# Altium PCB TINY24_PCB.PcbDoc
Units mil, origin at the board's own origin, x right, y up, seen from the top; angles counter-clockwise.
Board outline 1180 x 790 mil, 2 copper layers (Top Layer, Bottom Layer); 12 components, 16 nets, 61 pads, 7 vias.
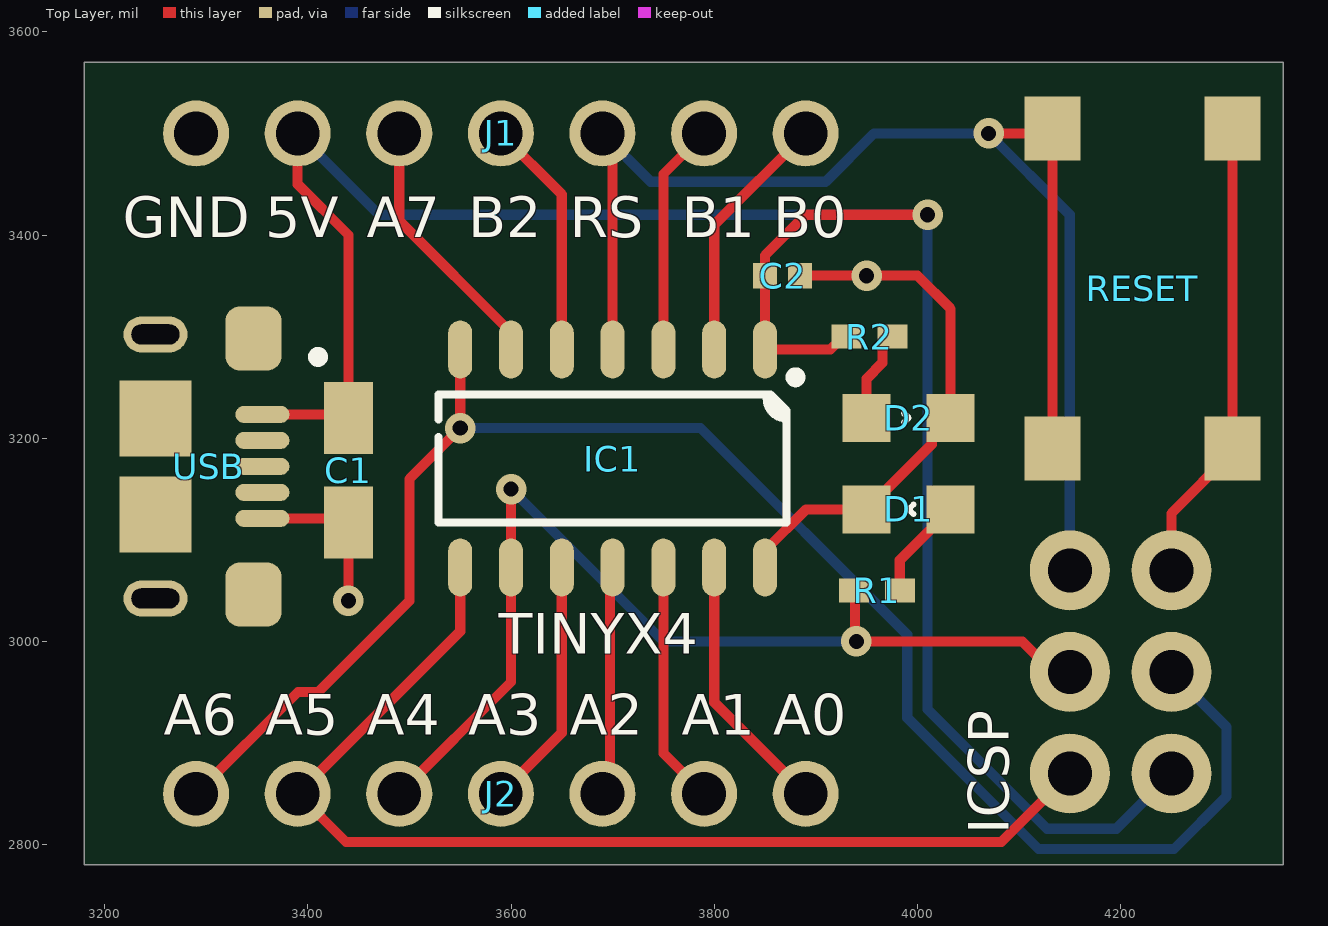
[diagram p0: Top Layer view]
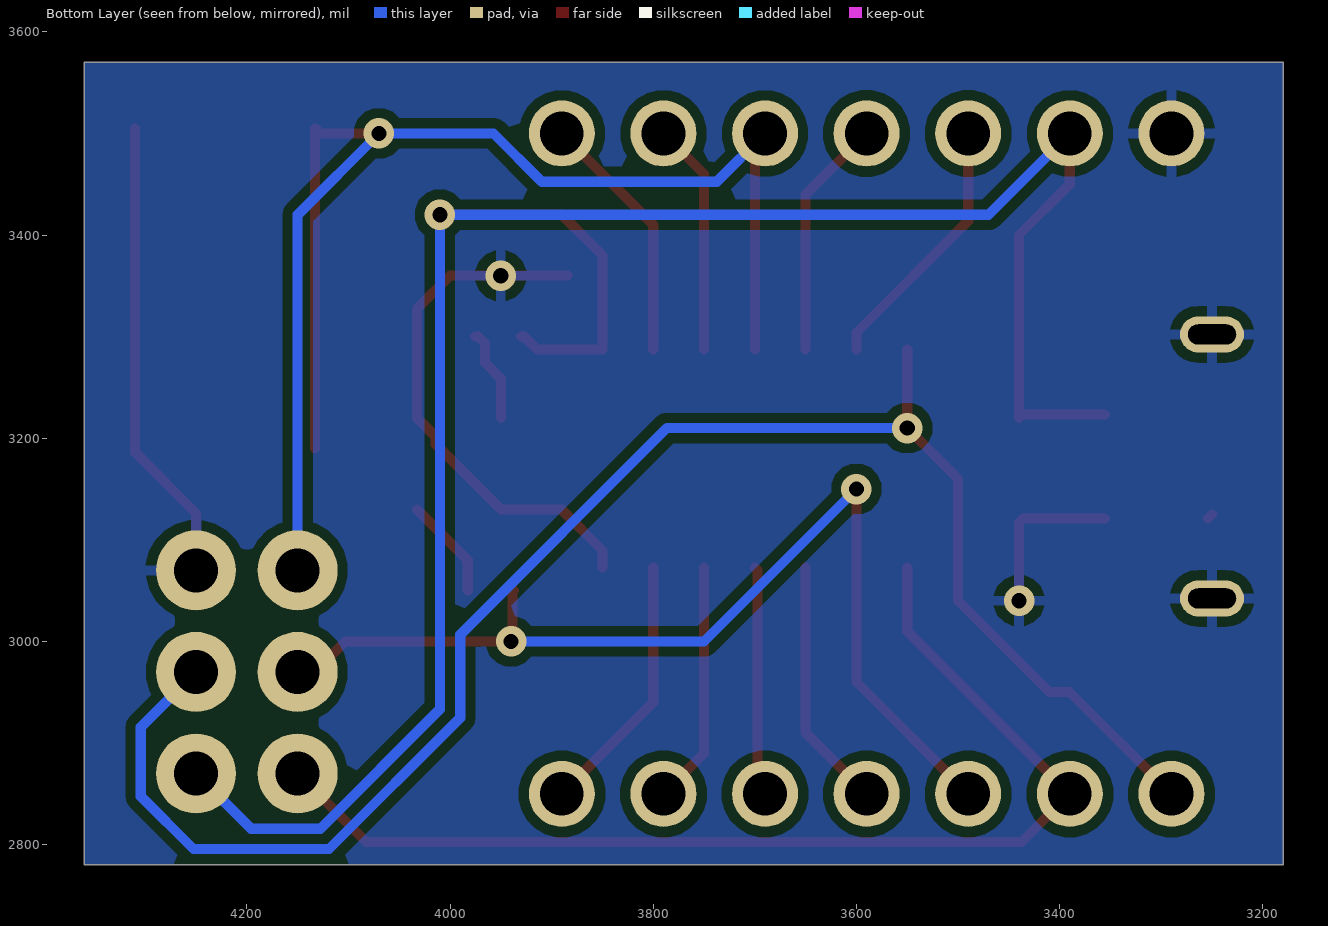
[diagram p1: Bottom Layer view, seen from below]

## Layer stack, top to bottom
Top Solder: solder mask 0.4, Solder Resist, Dk 3.5
Top Layer: signal copper 1.4
Dielectric 1: dielectric 12.6, FR-4, Dk 4.8
Bottom Layer: signal copper 1.4
Bottom Solder: solder mask 0.4, Solder Resist, Dk 3.5

## Board outline
3180,3570 4360,3570 4360,2780 3180,2780

## Design rules (kind name [scope] priority, off if disabled: settings)
Clearance [All] p1: gap=10 ignorepadtopadclearanceinfootprint=FALSE
PolygonConnect [All] p1: connectstyle=Relief reliefconductorwidth=10 reliefentries=4 polygonreliefangle="90 Angle" airgapwidth=10
RoutingVias [All] p1: holewidth=28 width=50 viastyle="Through Hole" minholewidth=28 minwidth=50 maxholewidth=28 maxwidth=50
SolderMaskExpansion [All] p1: expansion=4 istentingtop=FALSE
SupplyNets "Schematic Supply Nets" [InNet('GND')] p1: voltage=0.000
Width [All] p1: maxlimit=10 minlimit=10 preferedwidth=10
30 further rules are at their usual default settings.

## Classes and differential pairs
component class TINY24: C1 C2 D1 D2 IC1 ICSP J2 R1 R2 RESET USB

## Components (designator, comment, footprint, x,y, rotation, side; value= is the part's Value field where it differs from the comment)
C1 "22 µF" "CAP POL 1206_3216" 3440,3168.43 r270 top
C2 "0.022 µF" "CAP 0402_1005" 3867.32,3360 r180 top
D1 "CLK" "LED 0805_2012 GREEN" 3991.34,3130 r180 top value=Green
D2 "PWR" "LED 0805_2012 GREEN" 3991.34,3220 r0 top value=Green
IC1 "ATTINY44A-SSU" "ATMEL SO-14 14S1" 3700,3180 r270 top
ICSP "M20-9740346" "HARWIN M20-9740345" 4200,2970 r90 top
J1 "7pin-2.54MaleHeader" 7Pin2.54Header 3640,3500 r180 top
J2 "7pin-2.54MaleHeader" 7Pin2.54Header 3640,2850 r180 top
R1 "1k" "RES 0402_1005" 3960,3050 r0 top
R2 "1k" "RES 0402_1005" 3952.64,3300 r180 top
RESET "B3FS-1012P" "OMRON B3FS-1012P" 4221.42,3347.48 r270 top
USB "10118193-0001LF" "FCI USB 10118193-0001LF" 3251.97,3172.24 r90 top

## Footprints (in the part's own frame and the unit in brackets; to place one, negate y for a bottom-side part, rotate by r counter-clockwise, add the part's x,y. Pads: shape width x height; smd on the part's side, far side on the other; paste and mask are expansions set on the pad)
7Pin2.54Header [mil]
  round 65 hole 43: 0(-250,0) 1(-150,0) 2(-50,0) 3(50,0) 4(150,0) 5(250,0) 6(350,0)
"ATMEL SO-14 14S1" [mm] "SOIC, 14-Leads, Body 8.65x3.90mm, Pitch 1.27mm, IPC Medium Density"
  oval 1.45x0.6 smd: 1(-2.725,3.81) 2(-2.725,2.54) 3(-2.725,1.27) 4(-2.725,0) 5(-2.725,-1.27) 6(-2.725,-2.54) 7(-2.725,-3.81) 8(2.725,-3.81) 9(2.725,-2.54) 10(2.725,-1.27) 11(2.725,0) 12(2.725,1.27) 13(2.725,2.54) 14(2.725,3.81)
  silkscreen extent -2.16,-4.35 1.6,4.7, body extent -3.01,-4.33 3.01,4.32, height 1.65
"CAP 0402_1005" [mm] "Chip Capacitor, 2-Leads, Body 1.02x0.51mm, IPC Medium Density"
  rect 0.6x0.64 smd: 1(-0.44,0) 2(0.44,0)
  body extent -0.5,-0.26 0.5,0.26, height 0.52
"CAP POL 1206_3216" [mm] "Molded Capacitor, 2-Leads, Body 3.20x1.6mm, IPC Medium Density"
  rect 1.8x1.23 smd: 1(-1.31,0) 2(1.31,0)
  silkscreen extent -2.96,-0.89 -2.71,-0.64, body extent -1.72,-0.85 1.71,0.85, height 1.7
"FCI USB 10118193-0001LF" [mm] "USB 2.0 Type B Micro"
  oval 0.425x1.35 smd: 1(1.3,-2.625) 2(0.65,-2.625) 3(0,-2.625) 4(-0.65,-2.625) 5(-1.3,-2.625)
  oval 0.9x1.6 hole 0.5 slot 1.2 at 90 deg: S(-3.3,0.05) S(3.3,0.05)
  rrect50% 1.6x1.4 smd: S(-3.2,-2.4) S(3.2,-2.4)
  rect 1.9x1.8 smd: S(-1.2,0.05) S(1.2,0.05)
  body extent -3.93,-2.9 3.93,2.76, height 2.78
"HARWIN M20-9740345" [mm] "2.54mm DIL PC TAIL PIN HEADER ASSEMBLY"
  round 2 hole 1.1: 1(-2.54,1.27) 2(0,1.27) 3(2.54,1.27) 4(2.54,-1.27) 5(0,-1.27) 6(-2.54,-1.27)
  body extent -3.81,-10.97 3.81,1.59, height 5
"LED 0805_2012 GREEN" [mm] "Chip Diode, 2-Leads, Body 2.00x1.25mm, IPC Medium Density"
  rect 1.2x1.2 smd: 1(-1.05,0) 2(1.05,0)
  silkscreen extent -0.12,-0.12 0,0.12, body extent -1,-0.62 1,0.63, height 0.9
"OMRON B3FS-1012P" [mm] "B3FS-1000 Flat Style, 4 Pins, 6.3x6.3x4.3mm, 4.5mm Pitch"
  rect 1.6x1.4 smd: 1(4,-2.25) 2(-4,-2.25) 3(4,2.25) 4(-4,2.25)
  body extent -4,-3.15 4,3.15, height 4.2
"RES 0402_1005" [mm] "Chip Resistor, 2-Leads, Body 1.0x0.5mm, IPC Medium Density"
  rect 0.75x0.6 smd: 1(-0.575,0) 2(0.575,0)
  body extent -0.5,-0.25 0.5,0.25, height 0.35

## Part data
C1: library part 293D105X9016A8T, "293D105X9016A8T", Capacitance="1 µF", Device Package="1206 (3216 Metric)", ESR (Equivalent Series Resistance)="9.3Ohm @ 100kHz", Manufacturer="Vishay Sprague", Manufacturer Size Code=A, Operating Temperature="-55°C ~ 125°C", Supplier Part Number 1=718-293D105X9016A8TCT-ND, Tolerance=±10%, Voltage - Rated="16 V", ComponentLink1Description=Datasheet, ComponentLink1URL=https://www.vishay.com/docs/40002/293d.pdf, ComponentLink2Description="DigiKey Link", ComponentLink2URL=https://www.digikey.com/en/products/detail/vishay-sprague/293D105X9016A8T/21707485, Features="General Purpose", Height - Seated (Max)="0.071\" (1.80mm)", LastUpdated="03.06.2024 19:29:26", Lifecycle Status=Active, Minimum Order=1, Mounting Type="Surface Mount", Package / Case="1206 (3216 Metric)", Packaging=TapeAndReel, Part Number=293D105X9016A8T, PartId=5870, Price=0.18, Series="TANTAMOUNT™, 293D", Size / Dimension="0.126\" L x 0.063\" W (3.20mm x 1.60mm)", Supplier 1=DigiKey, Type=Molded
C2: library part C0402C223K5RECAUTO, "CAP CER 0402 22NF 50V X7R 10%", Device Package="0402 (1005 Metric)", Manufacturer=KEMET, Operating Temperature="-55°C ~ 125°C", Ratings=AEC-Q200, Supplier Part Number 1=399-17166-1-ND, Temperature Coefficient=X7R, Tolerance=±10%, Voltage - Rated=50V, Applications="Automotive, ESD Protection", Capacitance="0.022 µF", ComponentLink1Description=Datasheet, ComponentLink1URL=https://api.kemet.com/component-edge/download/datasheet/C0402C223K5RECAUTO.pdf, ComponentLink2Description="DigiKey Link", ComponentLink2URL=https://www.digikey.com/en/products/detail/kemet/C0402C223K5RECAUTO/8563694, LastUpdated="09.02.2024 20:04:38", Lifecycle Status=Active, Minimum Order=1, Mounting Type="Surface Mount, MLCC", Package / Case="0402 (1005 Metric)", Packaging=TapeAndReel, Part Number=C0402C223K5RECAUTO, Part Status=Active, PartId=1729, Price=0.01, Series="ESD SMD Auto X7R", Size / Dimension="0.039\" L x 0.020\" W (1.00mm x 0.50mm)", Supplier 1=DigiKey, Thickness (Max)="0.022\" (0.55mm)"
D1 D2: library part QTLP630C4TR, "LED GREEN CLEAR 0805 SMD", Color=Green, Current - Test=20mA, Device Package="0805 (2012 Metric)", Lens Color=Colorless, Manufacturer="Everlight Electronics Co Ltd", Millicandela Rating=10mcd, Supplier Device Package=0805, Supplier Part Number 1=1080-1411-1-ND, Voltage - Forward (Vf) (Typ)=2.1V, ComponentLink1Description=Datasheet, ComponentLink1URL=//media.digikey.com/PDF/Data%20Sheets/Everlight%20PDFs/QTLP630-2.pdf, ComponentLink2Description="DigiKey Link", ComponentLink2URL=https://www.digikey.com/en/products/detail/everlight-electronics-co-ltd/QTLP630C4TR/2675902, Configuration=Standard, Height (Max)=1.20mm, LastUpdated="03.06.2024 20:00:30", Lens Size="1.40mm x 1.25mm", Lens Style="Rectangle with Flat Top", Lens Transparency=Clear, Lifecycle Status=Active, Minimum Order=1, Mounting Type="Surface Mount", Package / Case="0805 (2012 Metric)", Packaging=TapeAndReel, Part Number=QTLP630C4TR, Part Status=Active, PartId=240, Price=0.05, Series=-, Size / Dimension="2.00mm L x 1.25mm W", Supplier 1=DigiKey, Viewing Angle=140°, Wavelength - Dominant=570nm, Wavelength - Peak=565nm
IC1: "IC MCU 8BIT 4KB FLASH 14SOIC", Device Package="14-SOIC (0.154\", 3.90mm Width)", Manufacturer="Microchip Technology", Operating Temperature="-40°C ~ 85°C (TA)", Supplier Device Package=14-SOIC, Supplier Part Number 1=ATTINY44A-SSU-ND, Voltage - Supply (Vcc/Vdd)="1.8V ~ 5.5V", ComponentLink1Description=Datasheet, ComponentLink1URL=http://www.microchip.com/mymicrochip/filehandler.aspx?ddocname=en590191, ComponentLink2Description="DigiKey Link", ComponentLink2URL=//digikey.com/product-detail/en/microchip-technology/ATTINY44A-SSU/ATTINY44A-SSU-ND/1914708, Connectivity=USI, Core Processor=AVR, Core Size=8-Bit, Data Converters="A/D 8x10b", EEPROM Size="256 x 8", LastUpdated="04.12.2019 4:12:07", Lifecycle Status=0, Minimum Order=1, Mounting Type="Surface Mount", Number of I/O=12, Oscillator Type=Internal, Package / Case="14-SOIC (0.154\", 3.90mm Width)", Packaging=Tube, Part Number=ATTINY44A-SSU, Part Status=Active, PartId=95, Peripherals="Brown-out Detect/Reset, POR, PWM, Temp Sensor, WDT", Price=0.72, Program Memory Size="4KB (2K x 16)", Program Memory Type=FLASH, RAM Size="256 x 8", Series="AVR® ATtiny", Speed=20MHz, Supplier 1=DigiKey
ICSP: "CONN HEADER R/A 6POS 2.54MM", Current Rating (Amps)="3A per Contact", Insulation Color=Black, Manufacturer="Harwin Inc.", Material Flammability Rating="UL94 V-0", Operating Temperature="-40°C ~ 105°C", Supplier Part Number 1=M20-9740346-ND, ComponentLink1Description=Datasheet, ComponentLink1URL=https://cdn.harwin.com/pdfs/M20-974.pdf, ComponentLink2Description="DigiKey Link", ComponentLink2URL=http://digikey.com/product-detail/en/harwin-inc/M20-9740346/M20-9740346-ND/3920713, Connector Type="Header, Cuttable", Contact Finish - Mating=Tin, Contact Finish - Post=Tin, Contact Material=Brass, Contact Shape=Square, Contact Type="Male Pin", Fastening Type=Push-Pull, Insulation Material="Polyamide (PA6T), Nylon 6T", LastUpdated="21.09.2022 19:29:59", Lifecycle Status=Active, Minimum Order=4000, Mounting Type="Through Hole, Right Angle", Number of Positions=6, Number of Positions Loaded=All, Number of Rows=2, Packaging=Bulk, Part Number=M20-9740346, Part Status=Active, PartId=156, Price=0.10, Series=M20, Shrouding=Unshrouded, Style="Board to Board or Cable", Supplier 1=DigiKey, Termination=Solder
J1 J2: "2.54 Male Header DuPont 7pin"
R1 R2: library part RCA04021K00FKEDHP, "RES 1K OHM 1% 1/5W 0402", Device Package="0402 (1005 Metric)", Manufacturer="Vishay Dale", Operating Temperature="-55°C ~ 155°C", Power (Watts)="0.2W, 1/5W", Ratings=AEC-Q200, Resistance="1 kOhms", Supplier Device Package=0402, Supplier Part Number 1=541-3240-1-ND, Temperature Coefficient=±100ppm/°C, Tolerance=±1%, ComponentLink1Description=Datasheet, ComponentLink1URL=http://www.vishay.com/docs/20067/rcahp.pdf, ComponentLink2Description="DigiKey Link", ComponentLink2URL=https://www.digikey.com/en/products/detail/vishay-dale/RCA04021K00FKEDHP/6561237, Composition="Thick Film", Features="Anti-Sulfur, Automotive AEC-Q200, Pulse Withstanding", Height - Seated (Max)="0.016\" (0.40mm)", LastUpdated="09.02.2024 20:30:21", Lifecycle Status=Active, Minimum Order=1, Number of Terminations=2, Package / Case="0402 (1005 Metric)", Packaging=TapeAndReel, Part Number=RCA04021K00FKEDHP, Part Status=Active, PartId=3119, Price=0.02, Series=RCA-HP, Size / Dimension="0.039\" L x 0.020\" W (1.00mm x 0.50mm)", Supplier 1=DigiKey
RESET: "SWITCH TACTILE SPST-NO 0.05A 24V", Contact Rating @ Voltage="0.05A @ 24VDC", Manufacturer="Omron Electronics Inc-EMC Div", Operating Force=150gf, Operating Temperature="-25°C ~ 70°C", Supplier Part Number 1=SW1237CT-ND, Actuator Height off PCB, Vertical=4.30mm, Actuator Orientation="Top Actuated", Actuator Type=Standard, Circuit=SPST-NO, ComponentLink1Description=Datasheet, ComponentLink1URL=https://omronfs.omron.com/en_US/ecb/products/pdf/en-b3fs.pdf, ComponentLink2Description="DigiKey Link", ComponentLink2URL=http://digikey.com/product-detail/en/omron-electronics-inc-emc-div/B3FS-1012P/SW1237CT-ND/2747253, Illumination=Non-Illuminated, LastUpdated="30.03.2020 15:12:46", Lifecycle Status=Active, Minimum Order=1, Mounting Type="Surface Mount", Outline="6.30mm x 6.00mm", Packaging=TapeAndReel, Part Number=B3FS-1012P, Part Status=Active, Price=0.35, Series=B3FS, Supplier 1=DigiKey, Switch Function=Off-Mom, Termination Style="Gull Wing"
USB: "CONN RCPT USB2.0 MICRO B SMD R/A", Current Rating (Amps)="1.8A per Contact", Manufacturer="Amphenol ICC (FCI)", Operating Temperature="-30°C ~ 80°C", Supplier Part Number 1=609-4616-2-ND, Voltage - Rated=100VAC, ComponentLink1Description=Datasheet, ComponentLink1URL=https://cdn.amphenol-icc.com/media/wysiwyg/files/documentation/datasheet/inputoutput/io_usb_micro.pdf, ComponentLink2Description="DigiKey Link", ComponentLink2URL=//digikey.com/product-detail/en/amphenol-icc-fci/10118193-0001LF/609-4616-2-ND/2785388, Connector Type="USB - micro B", Features="Solder Retention", Gender=Receptacle, LastUpdated="09.12.2019 20:51:28", Lifecycle Status=0, Mating Cycles=10000, Minimum Order=1, Mounting Feature=Horizontal, Mounting Type="Surface Mount, Right Angle; Through Hole", Number of Contacts=5, Number of Ports=1, Packaging=TapeAndReel, Part Number=10118193-0001LF, Part Status=Active, Price=0.21, Series=-, Shielding=Shielded, Specifications="USB 2.0", Supplier 1=DigiKey, Termination=Solder

## Via types
v1: diameter 30, hole 15, Top Layer to Bottom Layer, 7 vias

## Nets (pads, with @x,y where several pads share a name; then routed paths per layer and width w, separated by ;. In a path a pad name is that pad's centre, name@x,y a point inside that pad or via, vN(x,y) a via of type N, cw(c..) or ccw(c..) an arc to the next point about the centre after c; other vN are vias at no path point)
GND: C1.2 C2.1 D1.2 D2.2 IC1.14 ICSP.4 J1.6 RESET.3 RESET.4 USB.5 USB.S | length 1155.3
  Top Layer w10: USB.S@3250,3125 USB.S@3253.94,3121.06 ; USB.5 3435.79,3121.06 C1.2 v1(3440,3040) ; IC1.14 3850,3089.45 3890.55,3130 D1.2 4014.06,3194.06 4014.06,3201.38 D2.2 4032.68,3327.32 4000,3360 v1(3950,3360) C2.1 ; ICSP.4 4250,3126.06 4310,3186.06 RESET.3 RESET.4
NetD1_1: D1.1 R1.2 | length 100.7
  Top Layer w10: R1.2 3982.64,3079.96 D1.1
NetD2_1: D2.1 R2.1 | length 92.2
  Top Layer w10: D2.1 3950,3258.62 3965.51,3274.13 3965.51,3293.19 3972.32,3300 R2.1
PA0: IC1.13 J2.0 | length 260
  Top Layer w10: IC1.13 3800,2940 J2.0
PA1: IC1.12 J2.1 | length 239.3
  Top Layer w10: IC1.12 3750,2890 J2.1
PA2: IC1.11 J2.2 | length 226.9
  Top Layer w10: J2.2 3697.39,2857.39 3697.39,3070.11 IC1.11
PA3: IC1.10 J2.3 | length 247.6
  Top Layer w10: J2.3 3650,2910 IC1.10
PA4/SCL: IC1.9 ICSP.2 J2.4 R1.1 | length 1021.2
  Top Layer w10: J2.4 3600,2960 IC1.9 v1(3600,3150) ; R1.1 3938.68,3048.68 3938.68,3001.32 v1(3940,3000) 4103.11,3000 4133.11,2970 ICSP.2
  Bottom Layer w10: v1(3600,3150) 3750,3000 v1(3940,3000)
PA5/MISO: IC1.8 ICSP.1 J2.5 | length 1096.6
  Top Layer w10: IC1.8 3550,3010 J2.5 3437.5,2802.5 4082.5,2802.5 ICSP.1
PA6/MOSI: IC1.7 ICSP.5 J2.6 | length 1697.1
  Top Layer w10: J2.6 3390.26,2950.26 3410.26,2950.26 3500,3040 3500,3160 v1(3550,3210) IC1.7
  Bottom Layer w10: v1(3550,3210) 3786.57,3210 3990,3006.57 3990,2924.82 4119.19,2795.63 4252.52,2795.63 4304.37,2847.48 4304.37,2915.63 ICSP.5
PA7: IC1.6 J1.4 | length 258.3
  Top Layer w10: J1.4 3490,3414.02 3600,3304.02 IC1.6
PB0: IC1.2 J1.0 | length 250
  Top Layer w10: IC1.2 3800,3410 J1.0
PB1: IC1.3 J1.1 | length 229.3
  Top Layer w10: IC1.3 3750,3460 J1.1
PB2: IC1.5 J1.3 | length 237.6
  Top Layer w10: J1.3 3650,3440 IC1.5
RESET: IC1.4 ICSP.3 J1.2 RESET.1 RESET.2 | length 1479.2
  Top Layer w10: J1.2 3700,3490 IC1.4 ; v1(4070,3500) 4127.87,3500 RESET.2 RESET.1
  Bottom Layer w10: J1.2 3737.5,3452.5 3909.68,3452.5 3957.18,3500 v1(4070,3500) 4150,3420 ICSP.3
VCC: C1.1 C2.2 IC1.1 ICSP.6 J1.5 R2.2 USB.1 | length 2192.6
  Top Layer w10: USB.1 3436.57,3223.43 C1.1 3440,3400 3390,3450 J1.5 ; R2.2 3927.05,3300 3914.33,3287.28 IC1.1 C2.2 3850,3380 3890,3420 v1(4010,3420)
  Bottom Layer w10: J1.5 3470,3420 v1(4010,3420) 4010,2933.11 4127.48,2815.63 4195.63,2815.63 ICSP.6
pads on no net: USB.2 USB.3 USB.4

## Polygon pours and split planes (outlines as drawn)
GND on Bottom Layer "GND_L02_P000" (solid, pour order 0): 3180,3570 4360,3570 4360,2780 3180,2780

## Silkscreen, mask and mechanical layers (free items; w line width, h text height)
Top Overlay:
  text "GND" at 3218,3398 h40
  text "5V" at 3358,3398 h40
  text "A7" at 3458,3398 h40
  text "B2" at 3558,3398 h40
  text "RS" at 3658,3398 h40
  text "B1" at 3768,3398 h40
  text "B0" at 3858,3398 h40
  text "TINYX4" at 3588,2988 h40
  text "A6" at 3258,2908 h40
  text "A5" at 3358,2908 h40
  text "A4" at 3458,2908 h40
  text "A3" at 3558,2908 h40
  text "A2" at 3658,2908 h40
  text "A1" at 3768,2908 h40
  text "A0" at 3858,2908 h40